# Altium PCB touch.PcbDoc
Units mil, origin at the board's own origin, x right, y up, seen from the top; angles counter-clockwise.
Board outline 6000 x 4000 mil, 2 copper layers (Top Layer, Bottom Layer); 35 components, 27 nets, 85 pads, 18 vias.
Unrouted connection lines stored in the file: 1.
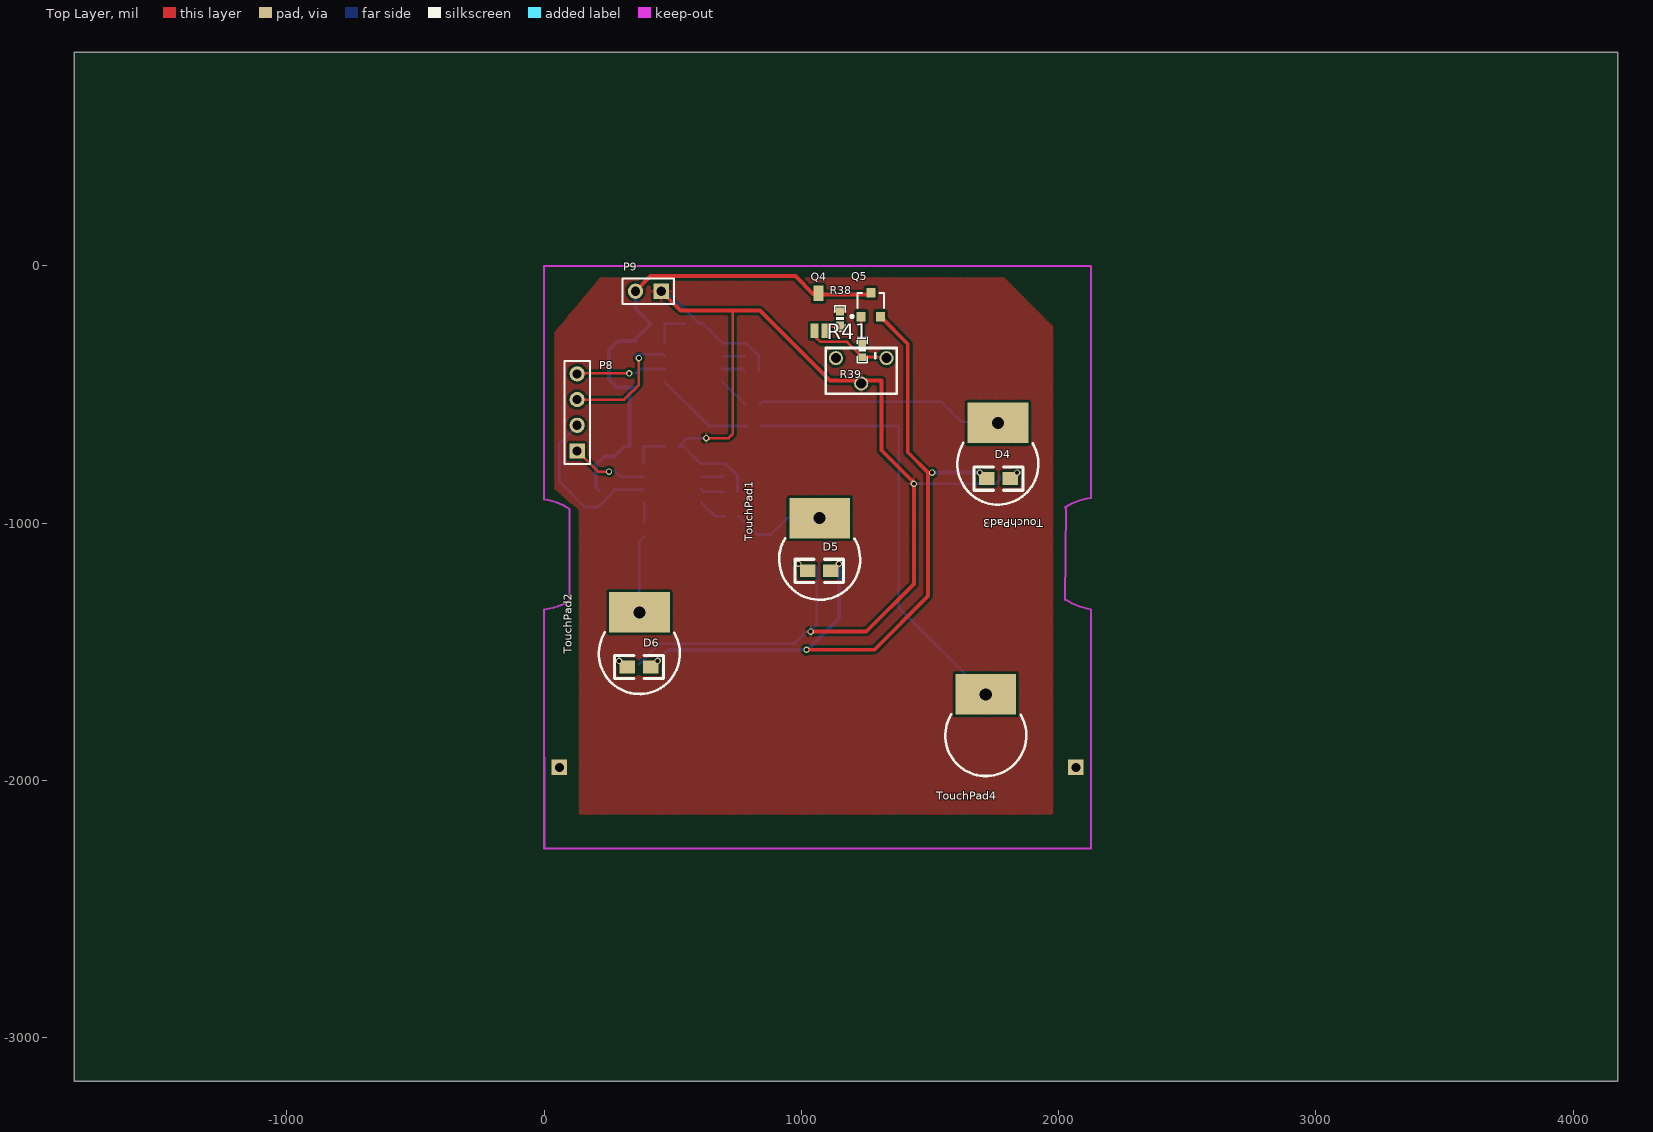
[diagram p0: Top Layer view]
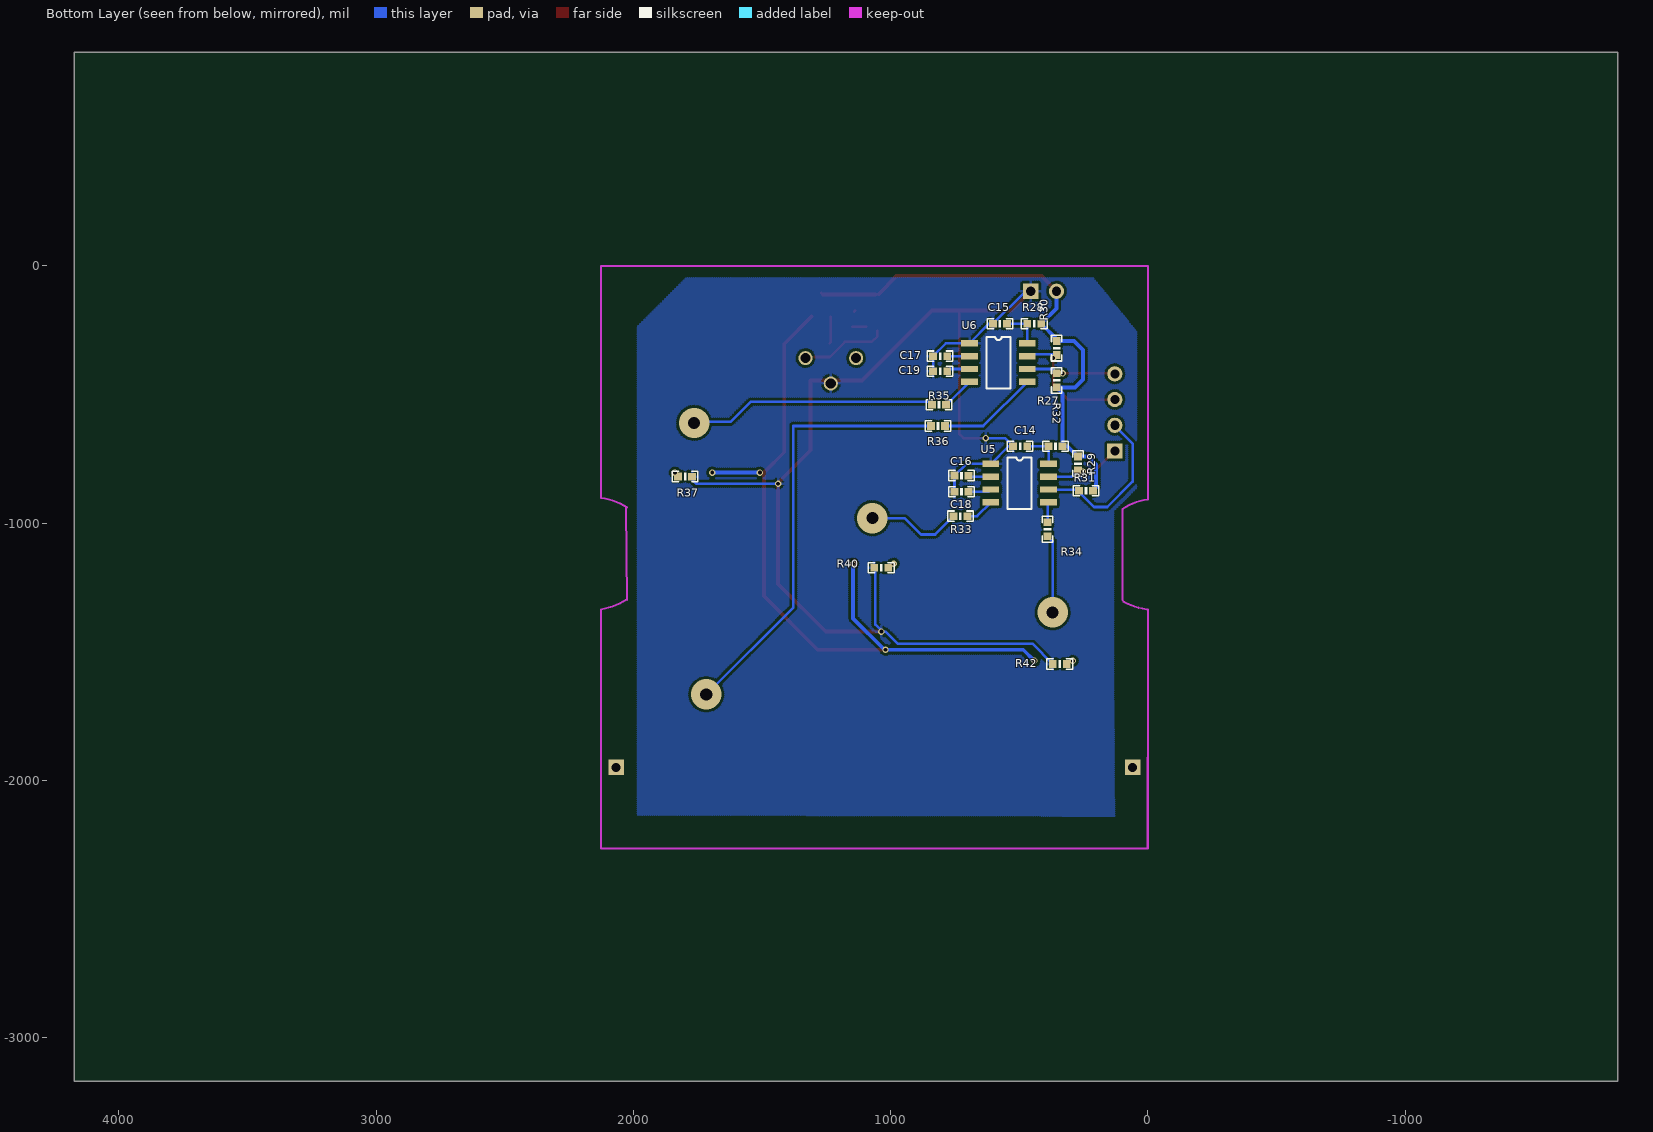
[diagram p1: Bottom Layer view, seen from below]

## Layer stack, top to bottom
Top Solder: solder mask 0.4, Solder Resist, Dk 3.5
Top Layer: signal copper 1.4
Dielectric 1: dielectric 12.6, FR-4, Dk 4.8
Bottom Layer: signal copper 1.4
Bottom Solder: solder mask 0.4, Solder Resist, Dk 3.5

## Board outline
-1826.85,-3169.37 4173.15,-3169.37 4173.15,830.63 -1826.85,830.63

## Design rules (kind name [scope] priority, off if disabled: settings)
Clearance [All] p1: gap=10 ignorepadtopadclearanceinfootprint=FALSE except(0: Arc-Hole Track-Hole SMDPad-Hole THPad-Hole Via-Hole Fill-Hole Poly-Hole Region-Hole Text-Hole)
HoleSize [All] p1: absolutevalues=TRUE maxlimit=120 minlimit=1 maxpercent=80.000 minpercent=20.000
HoleToHoleClearance [All] p1: gap=5 allowstackedmicrovias=TRUE
MinimumSolderMaskSliver [All] p1: minsoldermaskwidth=2
PolygonConnect [All] p1: connectstyle=Relief reliefconductorwidth=10 reliefentries=4 polygonreliefangle="90 Angle" airgapwidth=10
RoutingVias [All] p1: holewidth=28 width=50 viastyle="Through Hole" minholewidth=10 minwidth=10 maxholewidth=50 maxwidth=100
SilkToSilkClearance [All] p1: silktosilkclearance=0
SilkToSolderMaskClearance [IsPad] p1: minsilkscreentomaskgap=0 clearancetoexposedcopper=TRUE
SolderMaskExpansion [All] p1: expansion=4
Width [All] p1: maxlimit=30 minlimit=10 preferedwidth=10
25 further rules are at their usual default settings.

## Components (designator, comment, footprint, x,y, rotation, side; value= is the part's Value field where it differs from the comment)
C14 "100nF" 0603P 496.54,-700.87 r180 bottom
C15 "100nF" 0603P 574.78,-224.42 r180 bottom
C16 "4.7nf" 0603P 724.27,-814.98 r180 bottom value=4.7nF
C17 "4.7nf" 0603P 807.57,-350.47 r180 bottom value=4.7nF
C18 "50pf" 0603P 724.27,-877.97 r180 bottom value=50pF
C19 "50pf" 0603P 807.57,-409.53 r180 bottom value=50pF
D4 "LED1" 0805 1721.02,-826.71 r0 top
D5 "LED1" 0805 1114.17,-1185.1 r180 top
D6 "LED1" 0805 413.39,-1559.06 r180 top
P8 "Header 4" HDR1X4 128.15,-719.37 r90 top
P9 "Header 2" HDR1X2 454.72,-98.43 r180 top
Q4 "NPN" TEMT6000X01 1094.41,-244.17 r90 top
Q5 "PNP" SOT-23R 1269.61,-155.67 r0 top
R27 "20Ω" 0603P 358.75,-700.87 r180 bottom
R28 "20Ω" 0603P 441.43,-224.49 r180 bottom
R29 "10K" 0603P 271.57,-768.35 r90 bottom
R30 "10K" 0603P 354.25,-319.54 r90 bottom
R31 "10K" 0603P 240.16,-874.02 r0 bottom
R32 "10K" 0603P 354.32,-444.9 r90 bottom
R33 "1K" 0603P 728.21,-972.46 r180 bottom
R34 "1K" 0603P 389.69,-1023.7 r90 bottom
R35 "1K" 0603P 811.5,-539.45 r180 bottom
R36 "1K" 0603P 815.44,-622.13 r180 bottom
R37 "1K" 0603P 1798.65,-818.9 r0 bottom
R38 "0" 0603P 1149.61,-204.17 r270 top
R39 "1K" 0603P 1236.14,-326.85 r270 top
R40 "1K" 0603P 1035.99,-1173.23 r180 bottom
R41 "1M" RM063 1330.71,-358.27 r180 top
R42 "1K" 0603P 342.52,-1547.24 r180 bottom
TouchPad1 "TouchPad" "TOUCHKEY - LATCH" 1070.79,-980.39 r180 top
TouchPad2 "TouchPad" "TOUCHKEY - LATCH" 370,-1346.54 r180 top
TouchPad3 "TouchPad" "TOUCHKEY - LATCH" 1763.7,-610.32 r180 top
TouchPad4 "TouchPad" "TOUCHKEY - LATCH" 1716.46,-1665.43 r180 top
U5 "XW02C" SOP-8L 610.16,-768.98 r180 bottom
U6 "XW02C" SOP-8L 692.83,-300.47 r180 bottom

## Footprints (in the part's own frame and the unit in brackets; to place one, negate y for a bottom-side part, rotate by r counter-clockwise, add the part's x,y. Pads: shape width x height; smd on the part's side, far side on the other; paste and mask are expansions set on the pad)
0603P [mil]
  rect 30x30 smd: 1(-27,0) 2(27.5,-0.06)
  silkscreen extent -50,-20 50,20
0805 [mil]
  rect 60x50 smd: 1(0,-0.06) 2(90,-0.06)
  silkscreen extent -50,-45 140,45
HDR1X2 [mm] "Connector; Header; 2 Position"
  rect 1.5x1.5 hole 0.9: 1(0,0)
  round 1.5 hole 0.9: 2(2.54,0)
  silkscreen extent -1.27,-1.27 3.81,1.27
HDR1X4 [mm] "Connector; Header; 4 Position"
  rect 1.5x1.5 hole 0.9: 1(0,0)
  round 1.5 hole 0.9: 2(2.54,0) 3(5.08,0) 4(7.62,0)
  silkscreen extent -1.27,-1.27 8.89,1.27
RM063 [mm] "电位器"
  round 1.4 hole 1: 1(0,0) 2(2.5,2.5) 3(5,0)
  silkscreen extent -1,-1 6,3.5
SOP-8L [mil]
  rect 65x25 smd: 1(0,0) 2(0,-50) 3(0,-100) 4(0,-150) 5(224.41,-150) 6(224.41,-100) 7(224.41,-50) 8(224.41,0)
  silkscreen extent 65,-175 159,25
SOT-23R [mm]
  rect 0.9x0.95 smd: 1(0.95,-1.048) 2(-0.95,-1.048) 3(0,1.302)
  silkscreen extent -1.98,-1.17 1.3,1.3
TEMT6000X01 [mm] "光感"
  rect 1.5x1 smd: 1(3.5,0.7)
  rect 1.4x0.8 smd: 2(-0.2,1.1) 3(-0.2,0)
"TOUCHKEY - LATCH" [mm]
  rrect0% 6x4 smd: 1(0,0)
  silkscreen extent -4,1.97 4,8.06

## Part data
C14 C15 C16 C17 C18 C19: library part Cap, "Capacitor", LatestRevisionDate=17-Jul-2002, LatestRevisionNote="Re-released for DXP Platform.", PackageDescription="Radial Cap, Thru-Hole; 2 Leads; 0.3 in Pin Spacing", PackageReference=RAD-0.3, Published=8-Jun-2000, Publisher="Altium Limited"
D4 D5 D6: "Typical RED GaAs LED", LatestRevisionDate=08-Jul-2005, LatestRevisionNote="Mech Layer 1 removed.", PackageDescription="LED; 2 Leads", PackageReference=LED-1, Published=8-Jun-2000, Publisher="Altium Limited"
P8: "Header, 4-Pin", LatestRevisionDate=17-Jul-2002, LatestRevisionNote="Re-released for DXP Platform.", Publisher="Altium Limited"
P9: "Header, 2-Pin", LatestRevisionDate=17-Jul-2002, LatestRevisionNote="Re-released for DXP Platform.", Publisher="Altium Limited"
Q4: "NPN Bipolar Transistor", Code_JEDEC=TO-226-AA, LatestRevisionDate=17-Jul-2002, LatestRevisionNote="Re-released for DXP Platform.", PackageDescription="TO, Flat Index; 3 In-Line, Axial Leads; Body Dia. 4.8mm; Leads 0.55 x 0.51 mm (max)", PackageReference=TO-226-AA, Published=8-Jun-2000, Publisher="Altium Limited"
Q5: "8550", LatestRevisionDate=29-May-2009, LatestRevisionNote="IPC-7351 Footprint Added.", PackageDescription="3-Pin SOT-23 Package 0.95 mm Pitch, 2.4 mm Lead Span", PackageReference=SOT-23B, PackageVersion=Aug-1999, Published=8-Jun-2000, Publisher="Altium Limited"
R27 R28 R29 R30 R31 R32 R33 R34 R35 R36 R37 R38 R39 R40 R42: library part Res1, "Resistor"
  R27 R28 R29 R30 R31 R32 R33 R34 R35 R36 R37 R38 R40 R42: LatestRevisionDate=17-Jul-2002, LatestRevisionNote="Re-released for DXP Platform.", PackageDescription="Axial Device, Thru-Hole; 2 Leads; 0.3 in Pin Spacing", PackageReference=AXIAL-0.3, Published=8-Jun-2000, Publisher="Altium Limited"
R41: library part "Res Tap", "Tapped Resistor"
U5 U6: library part 24C256

## Free pads (board coordinates)
  rect 60x60 hole 35.43: 2(59.17,-1949.06) 3(2066.93,-1949.06)

## Via types
v1: diameter 25, hole 15, Top Layer to Bottom Layer, 14 vias
v2: diameter 118.11, hole 47.24, Top Layer to Bottom Layer, 4 vias

## Nets (pads, with @x,y where several pads share a name; then routed paths per layer and width w, separated by ;. In a path a pad name is that pad's centre, name@x,y a point inside that pad or via, vN(x,y) a via of type N, cw(c..) or ccw(c..) an arc to the next point about the centre after c; other vN are vias at no path point)
GND: C14.1 C15.1 C16.1 C17.1 C18.1 C19.1 P9.1 R37.1 R38.1 R40.1 R41.2 R42.1 U5.1 U6.1 | length 5253.3
  Top Layer w10: v1(629.92,-669.29) 716.54,-669.29 728.35,-657.48 732.2,-653.62 732.2,-173.31 ; R38.1@1137.64,-173.31 R38.1@1141.73,-177.4 ; v1(1437.01,-846.46) v1@1437.01,-842.52
  Top Layer w15: P9.1 529.61,-173.31 732.2,-173.31 838.66,-173.31 1110.24,-444.88 1310.94,-444.88 1310.94,-716.46 v1@1437.01,-842.52 ; v1(1035.43,-1421.26) 1251.97,-1421.26 1437.01,-1236.22 v1(1437.01,-846.46)
  Bottom Layer w10: R42.1@370.08,-1547.24 448.82,-1468.5 972.44,-1468.5 1019.69,-1421.26 v1(1035.43,-1421.26) 1035.43,-1417.32 1059.06,-1393.7 R40.1@1059.06,-1169.29 ; P9.1 475.78,-98.43 C15.1 616.79,-224.42 U6.1 784.57,-300.47 C17.1 C19.1 ; v1(629.92,-669.29) 555.12,-669.29 C14.1 542.05,-700.87 U5.1 705.27,-768.98 C16.1 C18.1 ; v1(1437.01,-846.46) 1755.91,-846.46 1771.65,-830.71 R37.1 R37.1@1771.65,-814.96
IN01: P8.1 R29.1 U5.7 | length 278.9
  Top Layer w10: P8.1@129.84,-719.76 209.37,-799.29 v1(251.89,-799.29)
  Bottom Layer w10: R29.1 295.2,-818.98 U5.7
IN02: P8.2 R31.2 U5.6 | length 646
  Bottom Layer w10: P8.2@129.84,-619.76 58.98,-690.63 58.98,-838.5 157.48,-937.01 204.57,-937.01 208.54,-937.01 ; 204.58,-937.03 208.54,-937.01 ; R31.2@268.33,-873.28 267.72,-873.28 267.72,-877.83 208.54,-937.01 ; R31.2@271.57,-870.16 384.57,-870.16 U5.6
IN03: P8.3 R30.1 U6.7 | length 504.2
  Top Layer w10: P8.3@129.84,-519.76 310.94,-519.76 368.03,-462.68 v1(368.03,-358.35)
  Bottom Layer w10: R30.1 366.06,-358.35 v1(368.03,-358.35) 368.03,-342.6 460.55,-342.6 U6.7
IN04: P8.4 R32.2 U6.6 | length 323
  Top Layer w10: P8.4@129.84,-419.76 132.2,-417.4 v1(330.63,-417.4)
  Bottom Layer w10: R32.2 371.18,-400.47 U6.6
NetC14_2: C14.2 R27.1 U5.8 | length 151.4
  Bottom Layer w10: U5.8 R27.1 385.81,-700.93 C14.2
NetC15_2: C15.2 R28.1 U6.8 | length 154.8
  Bottom Layer w10: U6.8 R28.1 C15.2
NetC16_2: C16.2 U5.2 | length 88.2
  Bottom Layer w10: U5.2 692.83,-818.98 C16.2
NetC17_2: C17.2 U6.2 | length 87.3
  Bottom Layer w10: U6.2 780,-350.47 C17.2
NetC18_2: C18.2 U5.3 | length 90.4
  Bottom Layer w10: U5.3 619.21,-878.03 C18.2
NetC19_2: C19.2 U6.3 | length 91
  Bottom Layer w10: U6.3 770.95,-400.47 C19.2
NetD4_1: D4.1 D5.1 D6.1 Q5.1 | length 2892.9
  Top Layer w15: v1(1019.69,-1492.13) 1283.46,-1492.13 1492.05,-1283.54 1492.05,-803.15 1413.31,-724.41 1413.31,-303.23 Q5.1
  Bottom Layer w15: v1(440.94,-1535.43) 484.25,-1492.13 v1(1019.69,-1492.13) 1023.62,-1492.13 1145.67,-1370.08 v1(1145.67,-1157.48) ; v1(1507.87,-803.15) v1(1692.91,-803.15)
NetD4_2: D4.2 R37.2
  other v1: 1838.58,-803.15
NetD5_2: D5.2 R40.2
  other v1: 988.11,-1157.56
NetD6_2: D6.2 R42.2
  other v1: 291.26,-1535.51
NetQ4_2: Q4.2 R39.2 R41.1 | length 299.1
  Top Layer w10: Q4.2@1051.18,-251.97 1051.18,-273.34 1073.12,-295.28 1177,-295.28 R39.2 1236.64,-353.79 1295.13,-353.79
NetQ4_3: Q4.3 R38.2 | length 54.7
  Top Layer w10: Q4.3@1094.87,-235.84 R38.2@1149.54,-235.84
NetQ5_2: Q5.2 R39.1 | length 104.6
  Top Layer w10: Q5.2 1232.2,-295.91 R39.1
NetR33_1: R33.1 TouchPad1.1 | length 371.6
  Bottom Layer w10: R33.1 826.77,-1044.02 881.26,-1044.02 944.88,-980.39 v2(1070.79,-980.39)
NetR33_2: R33.2 U5.4 | length 112.7
  Bottom Layer w10: U5.4 663.7,-972.52 R33.2
NetR34_1: R34.1 TouchPad2.1 | length 304
  Bottom Layer w10: v2(370,-1346.54) 370,-1070.39 R34.1
NetR34_2: R34.2 U5.5 | length 78.8
  Bottom Layer w10: U5.5 389.62,-922.85 R34.2
NetR35_1: R35.1 TouchPad3.1 | length 958.9
  Bottom Layer w10: R35.1 850.39,-527.56 1543.15,-527.56 1621.89,-606.3 v2@1759.84,-606.3
  other v2: 1763.7,-610.32
NetR35_2: R35.2 U6.4 | length 128.1
  Bottom Layer w10: U6.4 781.88,-539.51 R35.2
NetR36_1: R36.1 TouchPad4.1 | length 1719
  Bottom Layer w10: R36.1 1377.87,-622.13 1377.87,-1326.85 v2(1716.46,-1665.43)
NetR36_2: R36.2 U6.5 | length 390.6
  Bottom Layer w10: U6.5 640.14,-622.19 R36.2
VCC: P9.2 Q4.1 Q5.3 R27.2 R28.2 R29.2 R30.2 R31.1 R32.1 | length 2045.9
  Top Layer w10: Q5.3@1263.7,-110.32 Q5.3
  Top Layer w15: P9.2 413.78,-39.37 976.22,-39.37 1047.09,-110.24 ; Q4.1@1059.13,-110.32 Q5.3@1263.7,-110.32
  Bottom Layer w15: R31.1@212.6,-874.02 200.79,-862.2 200.79,-771.65 231.59,-740.85 R29.2 311.44,-700.93 R27.2 331.25,-494.97 R32.1 282.77,-471.9 251.89,-441.02 251.89,-326.85 286.7,-292.04 R30.2 ; R30.2@354.19,-284.29 R28.2 354.72,-165.35 P9.2
pads on no net: R41.3

## Polygon pours and split planes (outlines as drawn)
GND on Top Layer "Top Layer-No Net" (hatched 90Degree grid 0 track 8, pour order 0): 236.22,-47.24 1787.4,-47.24 1976.38,-236.22 1976.38,-559.06 1976.38,-1314.96 1976.38,-2125.98 1972.44,-2129.92 137.8,-2129.92 137.8,-948.82 42.59,-866.14 42.59,-259.13 219.16,-47.24 255.91,-47.24 228.35,-47.24 255.91,-47.24
GND on Bottom Layer "Top Layer-No Net" (hatched 90Degree grid 0 track 8, pour order 2): 1795.28,-47.24 212.6,-47.24 43.31,-256.84 43.31,-862.2 133.86,-952.76 133.86,-1594.49 129.92,-2137.8 1984.25,-2133.86 1984.25,-236.22

## Keep-outs
Keep-Out Layer:
  lines w7.87: -0.18,-1602.7 -0.18,-1334.72 ; 0,-1553.39 0.12,-2264.02 2125.98,-2264.02 2125.98,-1334.72 ; 0,-907.8 0,0 2125.98,0 2125.98,-901.65 ; 0.27,-907.8 cw(c-31.3,-1139) 98.35,-944.99 ; 3.86,-1334.72 ccw(c-23.53,-1104.18) 94.89,-1303.87 ; 98.43,-1299.21 98.6,-944.99 ; 2023.9,-939.43 cw(c2153.3,-1132.2) 2125.91,-901.65 ; 2025.06,-1299.2 2027.6,-939.46 ; 2026.7,-1296.78 ccw(c2157.48,-1103.53) 2125.91,-1334.72